# Altium PCB PCB1.PcbDoc
Units mil, origin at the board's own origin, x right, y up, seen from the top; angles counter-clockwise.
Board outline 1075 x 1380 mil, 2 copper layers (Top Layer, Bottom Layer); 11 components, 10 nets, 35 pads, 5 vias.
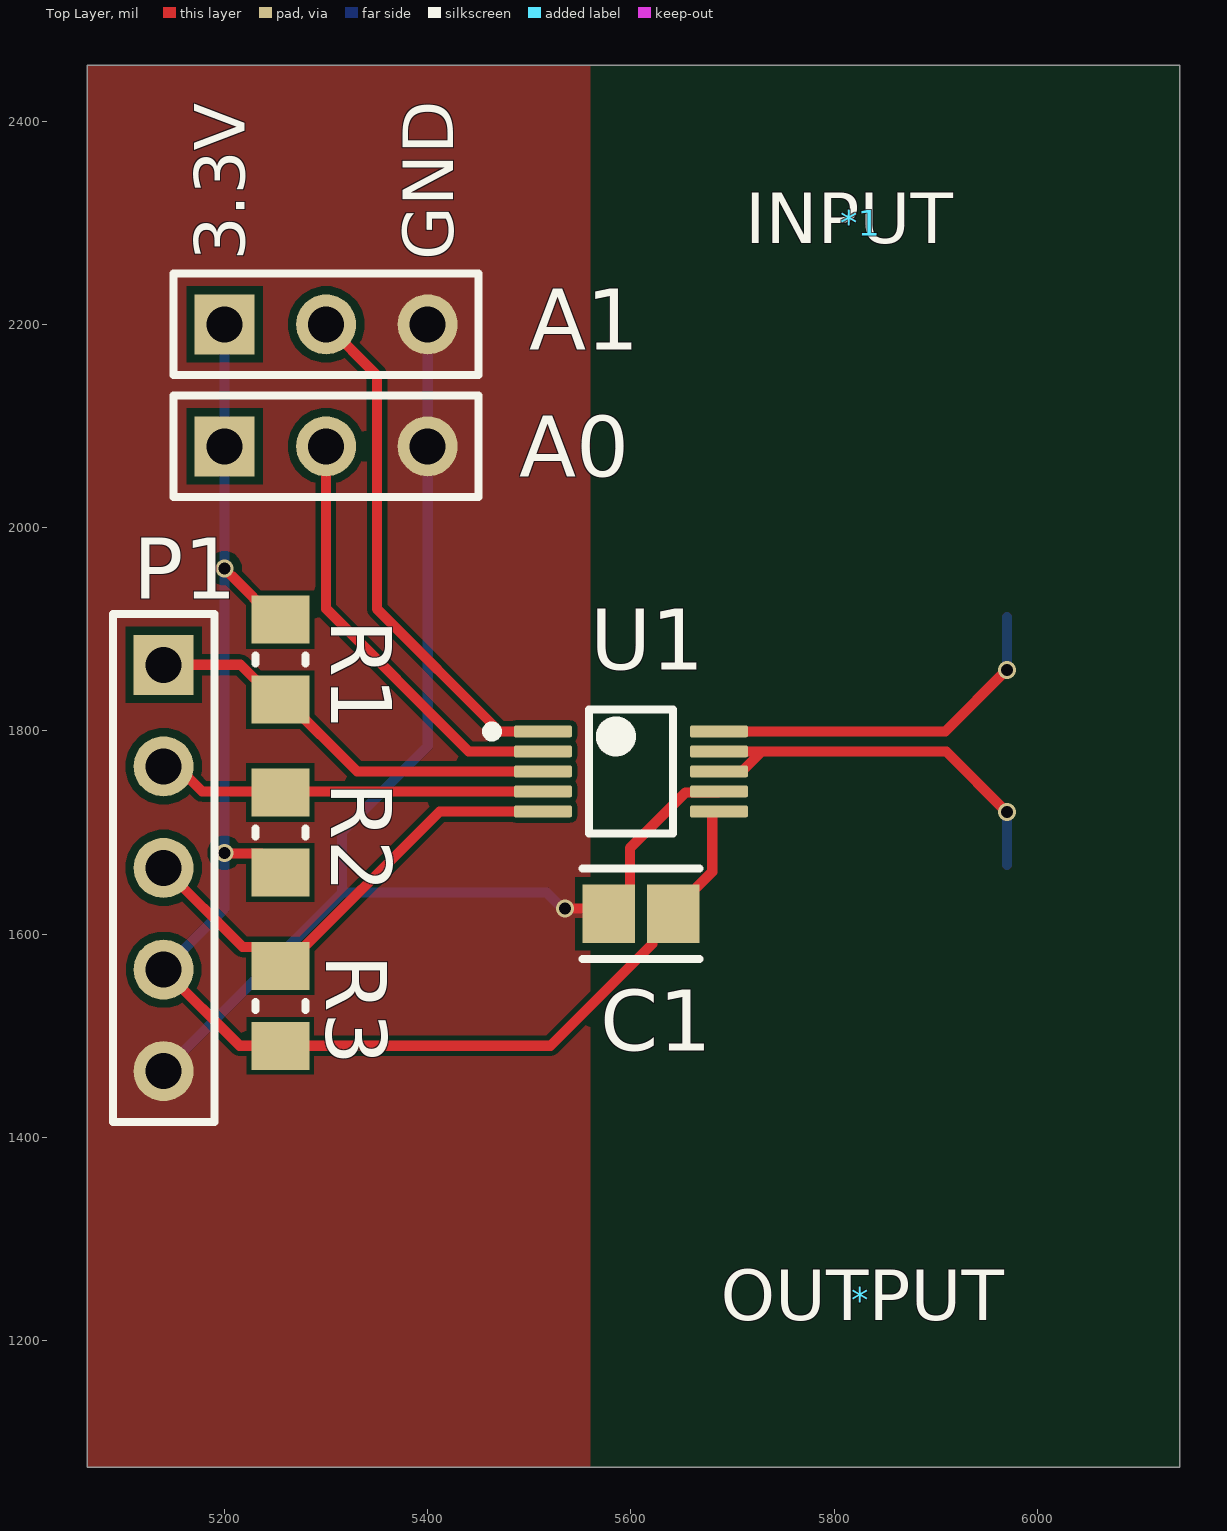
[diagram p0: Top Layer view]
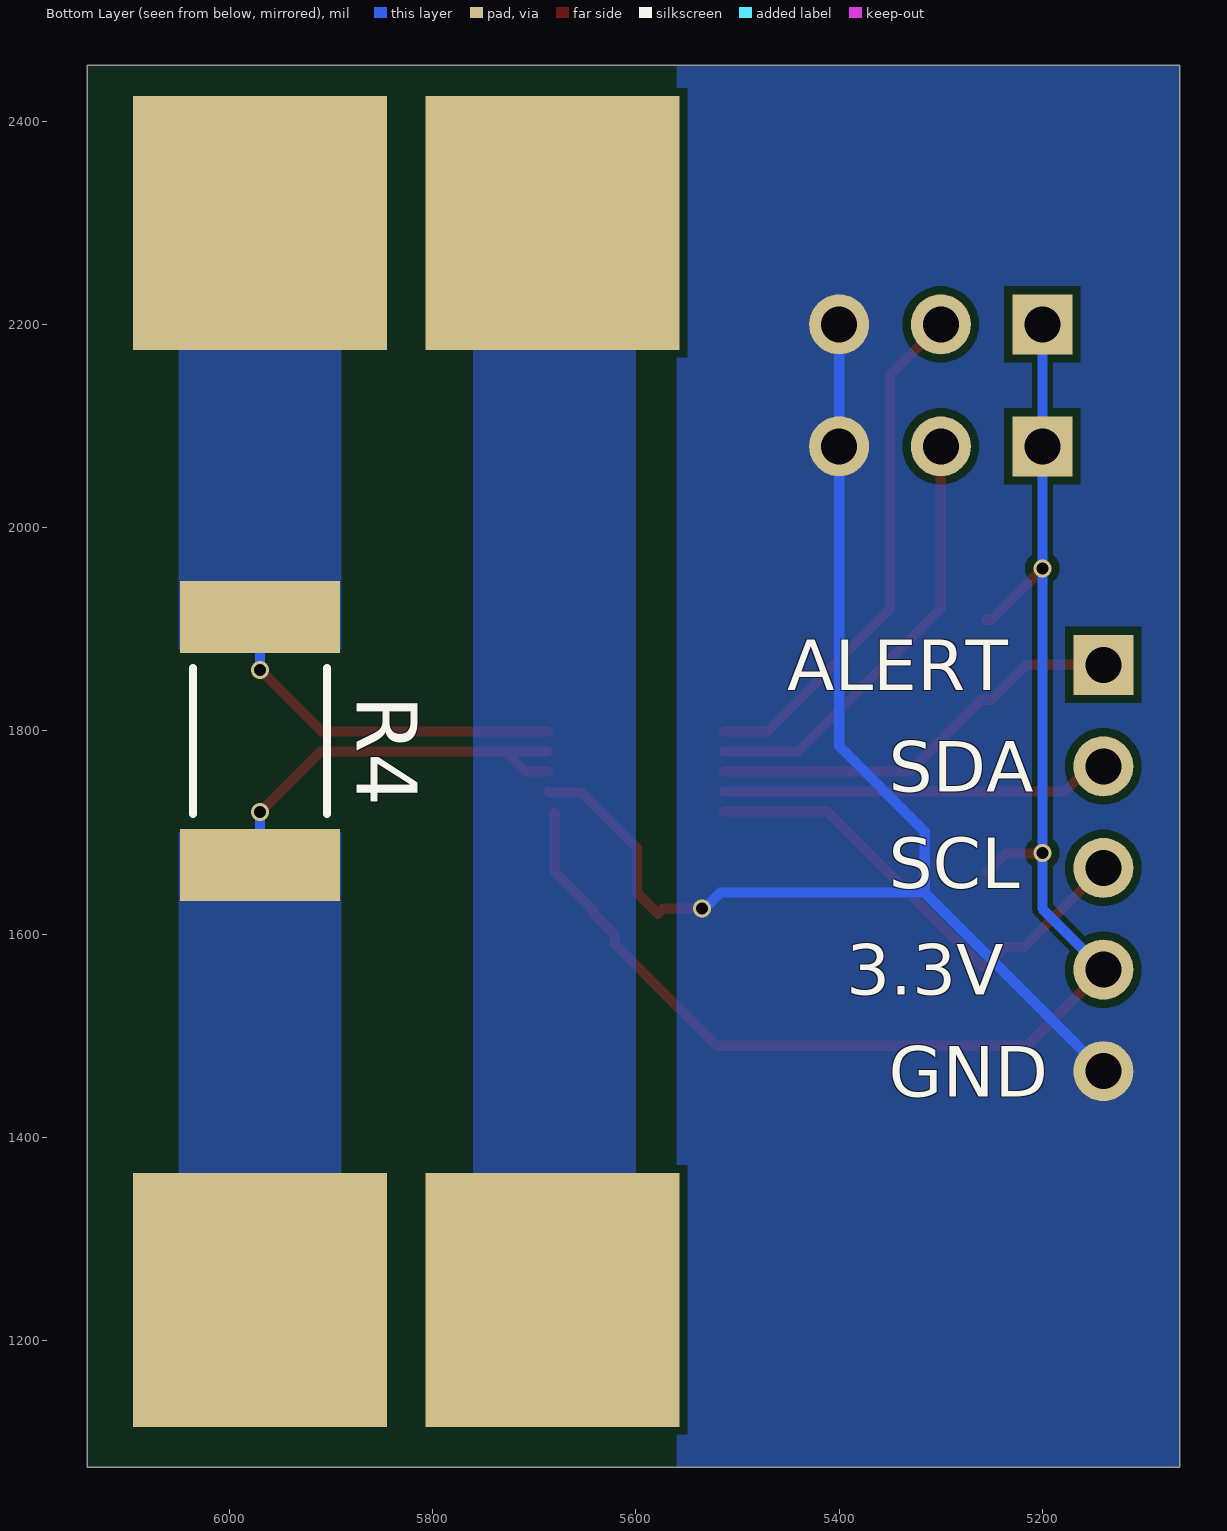
[diagram p1: Bottom Layer view, seen from below]
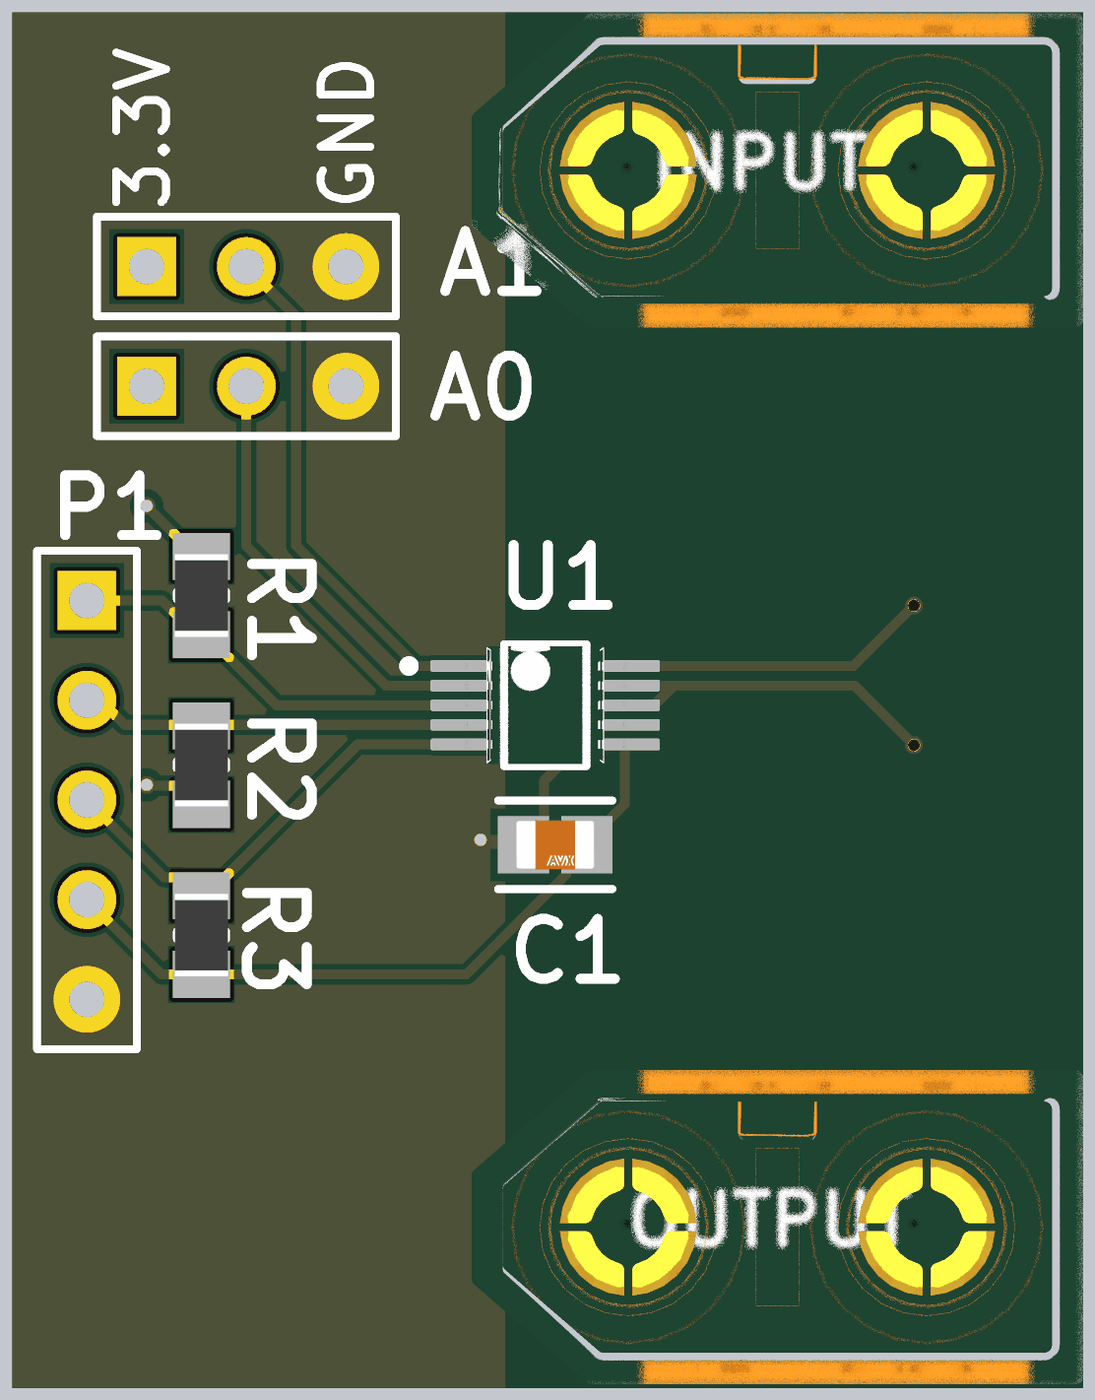
[diagram p2: 3D render of the assembled board from above, using the file's embedded part models]

## Layer stack, top to bottom
Top Solder: solder mask 0.4, Solder Resist, Dk 3.5
Top Layer: signal copper 1.4
Dielectric 1: dielectric 12.6, FR-4, Dk 4.8
Bottom Layer: signal copper 1.4
Bottom Solder: solder mask 0.4, Solder Resist, Dk 3.5

## Board outline
5065,1075 5065,2455 6140,2455 6140,1075

## Design rules (kind name [scope] priority, off if disabled: settings)
Clearance Clearance_POWER [(InNet('NetC205_2') OR InNet('NETC203_2') OR InNet('NETC206_2') OR InNet('NetP410_1') OR InNet('NetP410_3') OR InNet('VM'))] p1: gap=10 ignorepadtopadclearanceinfootprint=FALSE except(0: SMDPad-Hole THPad-Hole Via-Hole Fill-Hole Poly-Hole Region-Hole Text-Hole; 3.94: Arc-Arc Arc-Track Track-Track; 5: Arc-THPad Arc-Fill Arc-Poly Arc-Region Track-THPad Track-Fill Track-Poly Track-Region SMDPad-SMDPad; 7.87: Arc-SMDPad Track-SMDPad; 19.68: THPad-THPad THPad-Fill THPad-Poly THPad-Region Fill-Fill Fill-Poly Fill-Region Poly-Poly Poly-Region Region-Region)
Clearance [All] p2: gap=5 ignorepadtopadclearanceinfootprint=FALSE except(0: SMDPad-Hole THPad-Hole Via-Hole Fill-Hole Poly-Hole Region-Hole Text-Hole; 3.94: Arc-Arc Arc-Track Track-Track; 7.87: Arc-SMDPad Track-SMDPad THPad-Fill THPad-Poly THPad-Region Via-Fill Via-Poly Via-Region; 10: Arc-Via Arc-Text Arc-Hole Track-Via Track-Text Track-Hole SMDPad-THPad SMDPad-Via SMDPad-Text THPad-Via THPad-Text Via-Via Via-Text Fill-Text Poly-Text Region-Text Text-Text; 19.68: THPad-THPad)
ComponentClearance [All] p1: gap=5 collisioncheckmode=3 verticalgap=10 showdistances=FALSE
HoleSize [All] p1: absolutevalues=TRUE maxlimit=255.91 minlimit=1 maxpercent=80.000 minpercent=20.000
MinimumSolderMaskSliver [All] p1: minsoldermaskwidth=3.15
PlaneClearance [All] p1: clearance=7.87
PlaneConnect [All] p1: planeconnectstyle=Direct reliefexpansion=20 reliefentries=4 reliefconductorwidth=10 reliefairgap=10
PolygonConnect PolygonConnect_GND_POWER [InNet('GND') vs (HasFootprint('FP-FC-G-MFG') OR HasFootprint('FP-CL32-IPC_B') OR HasFootprint('TSON Advance_TOS') OR HasFootprint('XT60+MR60') OR HasFootprint('XT-60') OR HasFootprint('FP-SMAJ-CA-MFG') OR InNamedPolygon('GND_L01_P000'))] p1: connectstyle=Direct reliefconductorwidth=10 reliefentries=4 polygonreliefangle="90 Angle" airgapwidth=10
PolygonConnect PolygonConnect_GND [InNet('GND')] p2: thpad.connectstyle=Direct thpad.reliefconductorwidth=10 thpad.reliefentries=4 thpad.polygonreliefangle="90 Angle" thpad.airgapwidth=10 smdpad.connectstyle=Relief smdpad.reliefconductorwidth=7.87 smdpad.reliefentries=4 smdpad.polygonreliefangle="90 Angle" smdpad.airgapwidth=7.87 via.connectstyle=Direct via.reliefconductorwidth=10 via.reliefentries=4 via.polygonreliefangle="90 Angle" via.airgapwidth=10
PolygonConnect [All] p3: connectstyle=Direct reliefconductorwidth=10 reliefentries=4 polygonreliefangle="90 Angle" airgapwidth=10
RoutingVias [All] p1: holewidth=11.81 width=17.72 viastyle="Through Hole" minholewidth=11.81 minwidth=17.72 maxholewidth=21.65 maxwidth=27.56
SilkToSilkClearance [All] p1: silktosilkclearance=0
SilkToSolderMaskClearance [IsPad] p1: minsilkscreentomaskgap=5.91 clearancetoexposedcopper=TRUE
SolderMaskExpansion [All] p1: expansion=3.94 istentingtop=FALSE
Width Width_voltage [InNetClass('Voltage')] p1: maxlimit=19.68 minlimit=7.09 preferedwidth=7.09 minimp=50.000000 maximp=50.000000 favimp=50.000000
Width [All] p2: maxlimit=200 minlimit=5 preferedwidth=10 minimp=50.000000 maximp=50.000000 favimp=50.000000
23 further rules are at their usual default settings.

## Classes and differential pairs
component class Sheet1: * *1 C1 P1 R1 R2 R3 R4 U1

## Components (designator, comment, footprint, x,y, rotation, side; value= is the part's Value field where it differs from the comment)
* "XT-60 Connector" XT-60 6143,1399 r180 top
*1 "XT-60 Connector" XT-60 6143,2459 r180 top
A0 "Header 3" HDR1X3 5200,2080 r0 top
A1 "Header 3" HDR1X3 5200,2200 r0 top
C1 "100nF" FP-0805-L_2_01_0_2-W_1_25-IPC_B 5610,1620 r0 top
P1 "Header 5" HDR1X5 5140,1865 r270 top
R1 "2.2k" RESC2013X60X35ML10T20 5255,1870 r90 top
R2 "2.2k" RESC2013X60X35ML10T20 5255,1700 r270 top
R3 "2.2k" RESC2013X60X35ML10T20 5255,1529.37 r270 top
R4 "R002" FP-RL2512-MFG 5970,1790 r270 bottom value=100mΩ
U1 "INA233AIDGSR" FP-DGS0010A-MFG 5600,1760 r0 top

## Footprints (in the part's own frame and the unit in brackets; to place one, negate y for a bottom-side part, rotate by r counter-clockwise, add the part's x,y. Pads: shape width x height; smd on the part's side, far side on the other; paste and mask are expansions set on the pad)
FP-0805-L_2_01_0_2-W_1_25-IPC_B [mil]
  rect 51.36x57.33 smd paste+0 mask+0: 1(-31.72,0) 2(31.72,0)
  silkscreen extent -57,-44 57,44, body extent -67,-39 67,39, height 10
FP-DGS0010A-MFG [mm]
  rrect33% 1.45x0.3 smd paste+0 mask+0: 1(-2.2,1) 2(-2.2,0.5) 3(-2.2,0) 4(-2.2,-0.5) 5(-2.2,-1) 6(2.2,-1) 7(2.2,-0.5) 8(2.2,0) 9(2.2,0.5) 10(2.2,1)
  silkscreen extent -3.6,-1.55 1.05,1.55, body extent -3.03,-1.8 3.03,1.8, height 0.25
FP-RL2512-MFG [mm]
  rect 1.8x4 smd paste+0 mask+0: 1(-3.1,0) 2(3.1,0)
  silkscreen extent -1.83,-1.68 1.83,1.68, body extent -3.12,-1.59 3.23,1.61, height 0.65
HDR1X3 [mm] "Connector; Header; 3 Position"
  rect 1.5x1.5 hole 0.9: 1(0,0)
  round 1.5 hole 0.9: 2(2.54,0) 3(5.08,0)
  silkscreen extent -1.27,-1.27 6.35,1.27
HDR1X5 [mm] "Connector; Header; 5 Position"
  rect 1.5x1.5 hole 0.9: 1(0,0)
  round 1.5 hole 0.9: 2(2.54,0) 3(5.08,0) 4(7.62,0) 5(10.16,0)
  silkscreen extent -1.27,-1.27 11.43,1.27
RESC2013X60X35ML10T20 [mm] "Chip Resistor, 2-Leads, Body 2.1x1.35mm, IPC Low Density"
  rect 1.2x1.45 smd: 1(-1,0) 2(1,0)
  silkscreen extent -0.1,-0.63 0.1,0.63, body extent -1.05,-0.68 1.05,0.67, height 0.6
XT-60 [mil] "Battery Connector"
  rect 0x0 / inner rect 250x250 / far side rect 250x250 all layers, no hole: 1(173,159) 2(461,159)
  body extent 3,5 617,320, height 646

## Part data
* *1: Colour=yellow, Manufacturer=POLOLU, Manufacturer Part Number="XT60 YELLOW", Maximum current=65A, Category="Power Supply Modules", ComponentLink1Description=http://static.tme.eu/products_pics/8/b/5/8b5040a8a5baf3e0e67386c2e3a9b903/913.jpg, ComponentLink1URL=http://static.tme.eu/products_pics/8/b/5/8b5040a8a5baf3e0e67386c2e3a9b903/913.jpg, Information="Product is not a working device, but only component", MinAmount=1, Multiples=1, Number of Pins=2, Price Type=NET, Pricing 1="1=2.08, 10=1.95 (USD)", Stock 1=29, SuppliedAmount=0, Supplier 1=TME, Supplier Part Number 1="XT-60 Connector", Type of robotics accessories="power connector", Unit=pcs, Weight=7.267
A0 A1: "Header, 3-Pin", LatestRevisionDate=17-Jul-2002, LatestRevisionNote="Re-released for DXP Platform.", Publisher="Altium Limited"
C1: library part CMP-2007-04174-2, "General Purpose Ceramic Capacitor, 0805, 100nF, 10%, X7R, 15%, 100V", Case Code (Imperial)=0805, Case Code (Metric)=2012, Dielectric=X7R, Dielectric Material=Ceramic, Max Operating Temperature=125°C, Min Operating Temperature=-55°C, Package Quantity=2000, Tolerance=10%, Voltage=100V, Capacitance=100nF, Case/Package=0805, Construction=Flat, Contact Plating=Tin, Depth=1.25mm, Height=1.4mm, Lead Free="Lead Free", Length=2.01mm, Mount="Surface Mount", Number of Pins=2, Packaging="Tape and Reel", Radiation Hardening=No, REACH SVHC="No SVHC", RoHS Compliant=Yes, Series=-, Termination=SMD/SMT, Thickness=0.055inch, Voltage Rating=100V, Voltage Rating (DC)=100V, Width=0.049inch
P1: "Header, 5-Pin", LatestRevisionDate=17-Jul-2002, LatestRevisionNote="Re-released for DXP Platform.", Publisher="Altium Limited"
R1 R2 R3: library part CMP-2100-03673-1, "Chip Resistor, 0 Ohm, Jumper, +/- 5%, 0.125 W, -55 to 155 degC, 0805 (2012 Metric), RoHS, Tape and Reel", Case Code (Imperial)=0805, Case Code (Metric)=2012, Manufacturer=Yageo, Max Operating Temperature=155degC, Min Operating Temperature=-55degC, Package Description="2-Pin Surface Mounted Device, Body 2 x 1.25 mm", Power Rating=125mW, Resistance=0mOhm, Temperature Coefficient=200ppm/degreesC, Tolerance=5%, Voltage Rating=150V, Case/Package=0805, Composition=ThickFilm, Contact Plating=Tin, Datasheet URL=http://www.yageo.com/NewPortal/yageodocoutput?fileName=/pdf/R-Chip/PYu-RC_Group_51_RoHS_L_5.pdf, Datasheet Version="Rev. 5, 10/2016", Depth=1.25mm, Height=0.5mm, Lead Free=LeadFree, Length=2mm, Manufacturer URL=http://www.yageo.com/, Military Standard=Not, Number of Pins=2, Package Reference=0805, Packaging=TapeandReel, Radiation Hardening=No, REACH SVHC=Unknown, RoHSCompliant=true, Termination=SMD/SMT, Voltage Rating (DC)=150V, Width=1.25mm
R4: library part CMP-03412-013102-1, "RES 0.1 OHM 1% 1W 2512", Manufacturer=YAGEO, Manufacturer Part Number=RL2512FK-070R1L, Package=RL2512, Power Rating=1W, Resistance=100mΩ, Temperature="-55°C to +155°C", Temperature Coefficient=600ppm/°C, Temperature Range High=+155°C, Temperature Range Low=-55°C, Tolerance=1%, Automotive=Yes, Automotive Grade="Grade 0", Category=Res, ComponentLink2Description=Datasheet, ComponentLink2URL=http://www.yageo.com/documents/recent/PYu-RL_Group_521_RoHS_L_2.pdf, Composition="Thick Film", Device Class L1="Passive Components", Device Class L2=Resistors, Device Class L3="Chip SMD Resistors", Digikey Description="RES 0.1 OHM 1% 1W 2512", Footprint Url=http://www.yageo.com/exep/pages/download/literatures/PYu-R_Mount_10.pdf, Height=0.65mm, Ipc Land Pattern Name=RESC635320X55, Lead Free=Yes, Mouser Description="Current Sense Resistors 0.1ohm 1% 1W", Octopart=https://octopart.com/rl2512fk-070r1l-yageo-42334369, RoHS=TRUE, Series=RL
U1: library part CMP-04895-000095-1, Case/Package=VSSOP, Max Operating Temperature=125°C, Min Operating Temperature=-40°C, Output Current=10mA, Accuracy=0.1%, Mount="Surface Mount", Packaging="Tape and Reel", RoHS Compliant=Yes

## Via types
v1: diameter 17.72, hole 11.81, Top Layer to Bottom Layer, tented both sides, 5 vias

## Nets (pads, with @x,y where several pads share a name; then routed paths per layer and width w, separated by ;. In a path a pad name is that pad's centre, name@x,y a point inside that pad or via, vN(x,y) a via of type N, cw(c..) or ccw(c..) an arc to the next point about the centre after c; other vN are vias at no path point)
+3.3: A0.1 A1.1 C1.2 P1.4 R1.2 R2.2 R3.2 U1.6 | length 1496.7
  Top Layer w10: P1.4 5215,1490 R3.2 5520.83,1490 5621.04,1590.21 5621.04,1599.32 C1.2 5641.72,1622.98 5680,1661.26 U1.6@5680,1719.41 ; v1(5200,1680) 5200.75,1679.25 5236.38,1679.25 R2.2 ; 5206.48,1952.97 5250.08,1909.37 R1.2
  Bottom Layer w10: P1.4 5200,1625 v1(5200,1680) v1(5200,1960) A0.1 A1.1
A0: A0.2 U1.2 | length 431.5
  Top Layer w10: A0.2 5300,1920 5440.31,1779.68 U1.2
A1: A1.2 U1.1 | length 514.1
  Top Layer w10: A1.2 5350,2150 5350,1920 5470.63,1799.37 U1.1
GND: A0.3 A1.3 C1.1 P1.5 U1.7 | length 1297.7
  Top Layer w10: v1(5535,1625) 5573.28,1625 C1.1 5598.96,1640.68 5598.96,1684.49 5653.88,1739.41 5685.71,1739.41 U1.7
  Bottom Layer w10: P1.5 5315.75,1640.75 ; A1.3 A0.3 5400,1785 5315.75,1700.75 5315.75,1640.75 ; v1(5535,1625) 5532.91,1625 5517.16,1640.75 5315.75,1640.75
Net*1_1: *1.1 R4.1 U1.10 | length 360.5
  Top Layer w10: U1.10 5909.37,1799.37 v1(5970,1860)
  Bottom Layer w10: v1(5970,1860) R4.1
Net*1_2: *1.2 *.2
Net*_1: *.1 R4.2 U1.8 U1.9 | length 410.6
  Top Layer w10: U1.8 5709.25,1760 5728.94,1779.68 ; U1.9 5728.94,1779.68 ; v1(5970,1720) 5910.31,1779.68 5728.94,1779.68
  Bottom Layer w10: R4.2 v1(5970,1720)
NetP1_1: P1.1 R1.1 U1.3 | length 416.9
  Top Layer w10: P1.1 5215.71,1865 5250.08,1830.63 R1.1 5259.92,1830.63 5330.55,1760 U1.3
SCL: P1.3 R3.1 U1.5 | length 476.2
  Top Layer w10: P1.3 5217.64,1587.36 5236.38,1587.36 R3.1 5259.92,1568.74 5411.81,1720.63 U1.5
SDA: P1.2 R2.1 U1.4 | length 383.6
  Top Layer w10: P1.2 5153.27,1765 5177.96,1740.32 U1.4

## Polygon pours and split planes (outlines as drawn)
GND on Bottom Layer "GND_L02_P003" (solid, pour order 3): 5065,2455 5065,1075 5560,1075 5560,2455
Net*1_2 on Bottom Layer "NET*1_2_L02_P002" (solid, pour order 2): 5600,1120 5600,2420 5760,2420 5760,1120
Net*_1 on Bottom Layer "NET*_1_L02_P001" (solid, pour order 1): 5890,1160 5890,1700 6050,1700 6050,1160
Net*1_1 on Bottom Layer "NET*1_1_L02_P000" (solid, pour order 0): 5890,1880 5890,2420 6050,2420 6050,1880
GND on Top Layer "GND_L01_P004" (solid, pour order 4): 5065,2455 5065,1075 5560,1075 5560,2455

## Silkscreen, mask and mechanical layers (free items; w line width, h text height)
Top Overlay:
  text "INPUT" at 5712.54,2280.01 h50
  text "3.3V" at 5219.99,2262.53 h50 r90
  text "GND" at 5424.99,2263.35 h50 r90
  text "OUTPUT" at 5688.38,1220.01 h50
Bottom Overlay:
  text "ALERT" at 5451.13,1840.01 h50
  text "SDA" at 5351.16,1740.01 h50
  text "SCL" at 5351.16,1645.01 h50
  text "3.3V" at 5392.82,1540.01 h50
  text "GND" at 5351.16,1440.01 h50
Mechanical 1:
  the board outline again, w7.87